# EAGLE board Clamp-header (EAGLE 7.6.0)
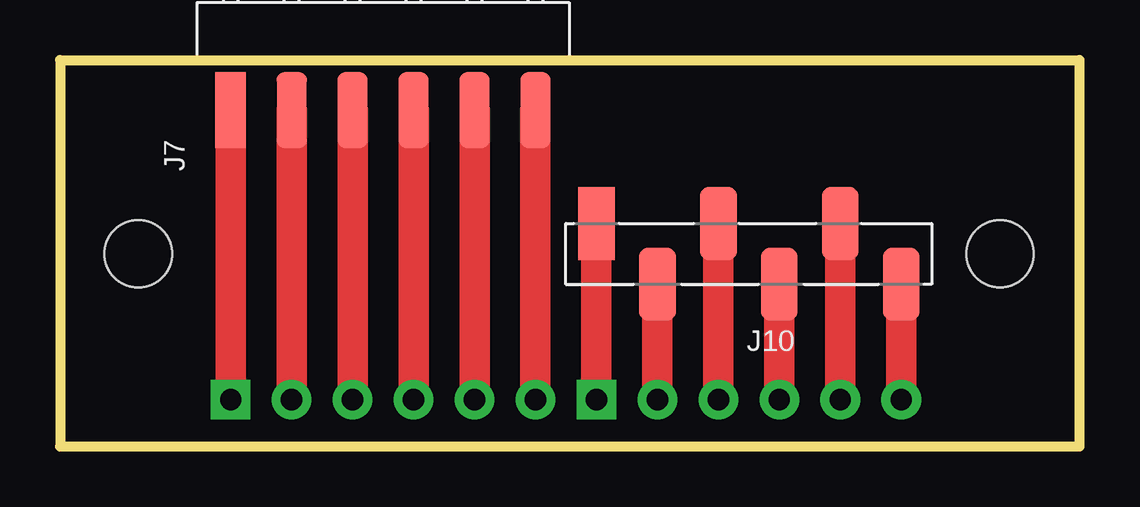
[diagram p0: board, top side]
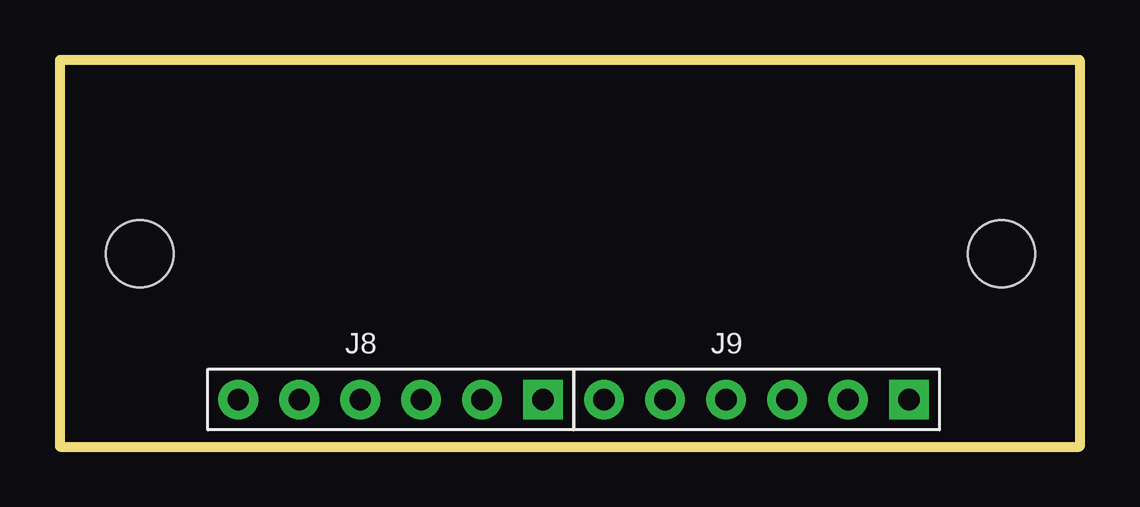
[diagram p1: board, bottom side, seen from below]

Size 42.48 x 16.13 mm. Coordinates in mm from the lower left corner, seen from the top.
Outline: 0,0 0,16.13 42.48,16.13 42.48,0 0.02,0
Copper layers (1*16): Top 0.035mm / dielectric 1.5mm / Bottom 0.035mm
Design rules "SparkFun": minimum track width 8mil, minimum drill 20mil, track to track 8mil, track to pad 8mil, pad to pad 8mil, via to via 8mil, smd to smd 8mil, copper to edge 10mil, drill to drill 8mil, minimum pad ring 12mil, minimum via ring 10mil, stop-mask expansion 4mil, vias tented up to drill 20mil, thermal gap 10mil
Net classes: 0 Default: width 0.203 mm; 1 VCC: width 0.305 mm
Holes 2.8 mm at 3.26,8.04 39.16,8.04

## Footprints (pad centres in the part's own frame; a part is rotated, then mirrored left to right if it is on the bottom)
H6-SMD-MALE-2.54-90D = smd 3.17 x 1.27: 1 0,6.35; 2 0,3.81; 3 0,1.27; 4 0,-1.27; 5 0,-3.81; 6 0,-6.35
H6-2.54-90D-FEMALE = drill 0.889 pad 1.651 square: 1 0,6.35 | drill 0.889 pad 1.651: 2 0,3.81; 3 0,1.27; 4 0,-1.27; 5 0,-3.81; 6 0,-6.35
H6-SMD-2.54 = smd 3.048 x 1.524: 1 1.27,6.35; 2 -1.27,3.81; 3 1.27,1.27; 4 -1.27,-1.27; 5 1.27,-3.81; 6 -1.27,-6.35

## Placement (x,y rotation side)
J7  6p-smd-2.54-90d  [H6-SMD-MALE-2.54-90D]  13.46,14.03 90 top
J8  6p-2.54-90d  [H6-2.54-90D-FEMALE]  28.7,1.97 270 bottom
J9  6p-2.54-90d  [H6-2.54-90D-FEMALE]  13.46,1.97 270 bottom
J10  6p-SMD-2.54  [H6-SMD-2.54]  28.7,8.04 90 top

## Library data of the parts
J7-J9 = Seeed-OPL-Connector
J10 = Seeed-OPL-Connector; MPN: F185-1106A0BZYB1

## Nets
N$25: J7.6 J9.6
N$26: J7.5 J9.5
N$27: J7.4 J9.4
N$28: J7.3 J9.3
N$29: J7.2 J9.2
N$30: J7.1 J9.1
N$31: J8.6 J10.6
N$32: J8.5 J10.5
N$33: J8.4 J10.4
N$34: J8.3 J10.3
N$35: J8.2 J10.2
N$36: J8.1 J10.1

## Tracks (layer width: path | path; a pad name or v marks a point on that pad's centre or on a via)
N$25
  Top 1.27: J9.6 J7.6
N$26
  Top 1.27: J9.5 J7.5
N$27
  Top 1.27: J9.4 J7.4
N$28
  Top 1.27: J9.3 J7.3
N$29
  Top 1.27: J9.2 J7.2
N$30
  Top 1.27: J9.1 J7.1
N$31
  Top 1.27: J10.6 J8.6
N$32
  Top 1.27: J10.5 J8.5
N$33
  Top 1.27: J10.4 J8.4
N$34
  Top 1.27: J10.3 J8.3
N$35
  Top 1.27: J10.2 J8.2
N$36
  Top 1.27: J10.1 J8.1